# EAGLE board DINx4 (EAGLE 6.4)
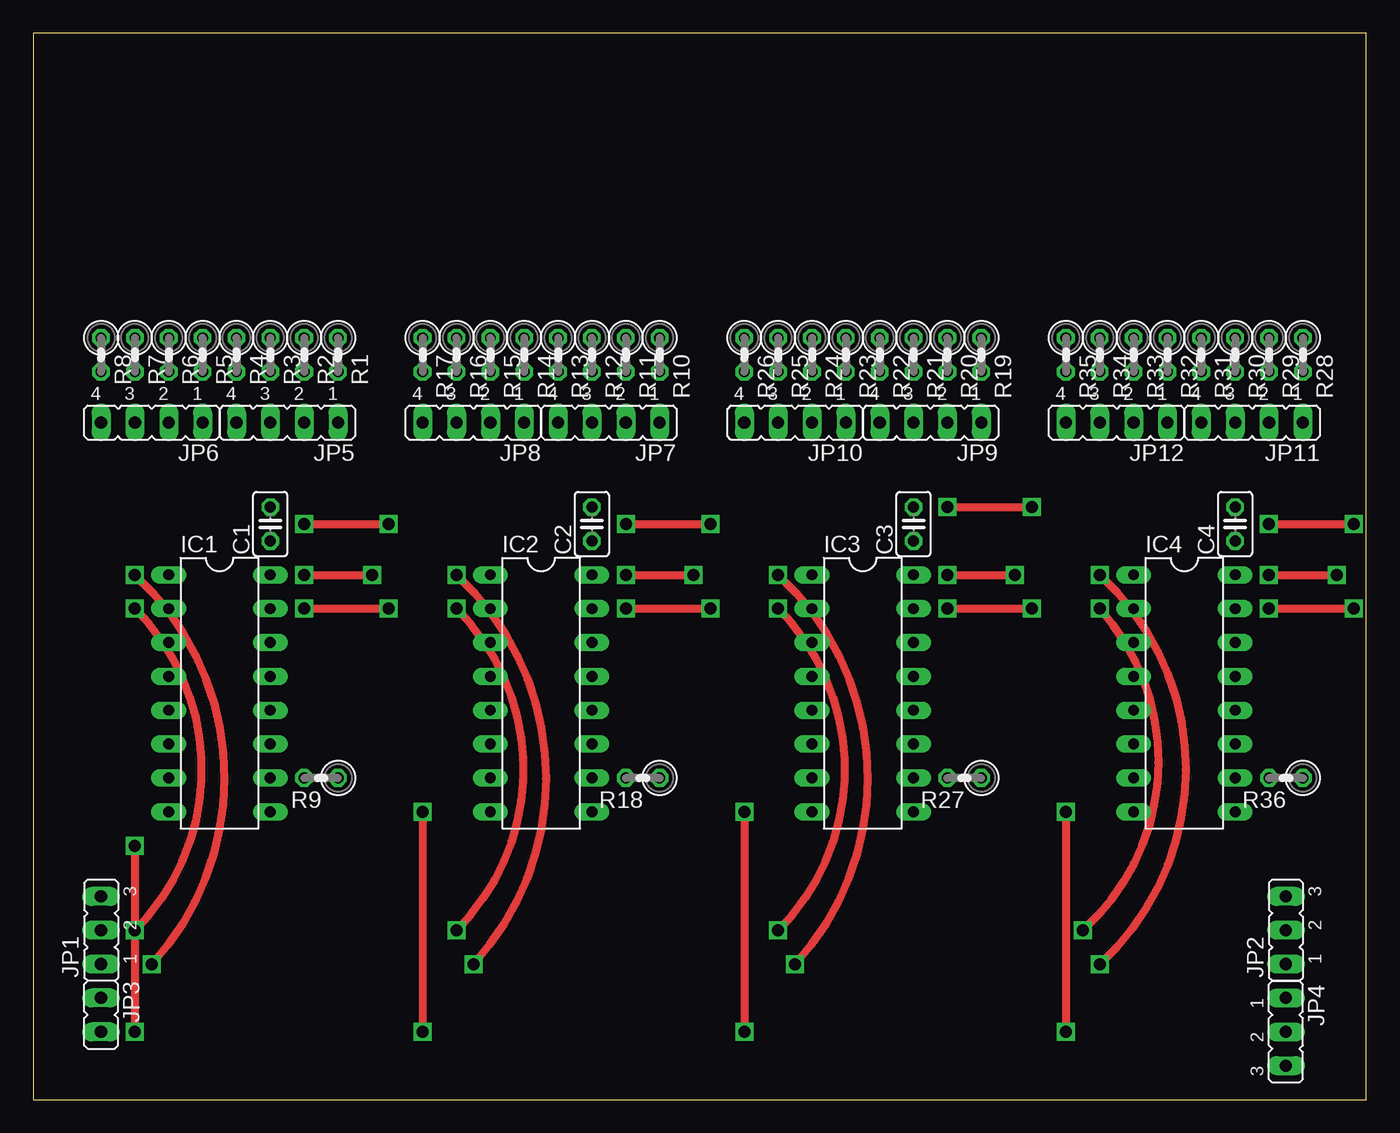
[diagram p0: board, top side]
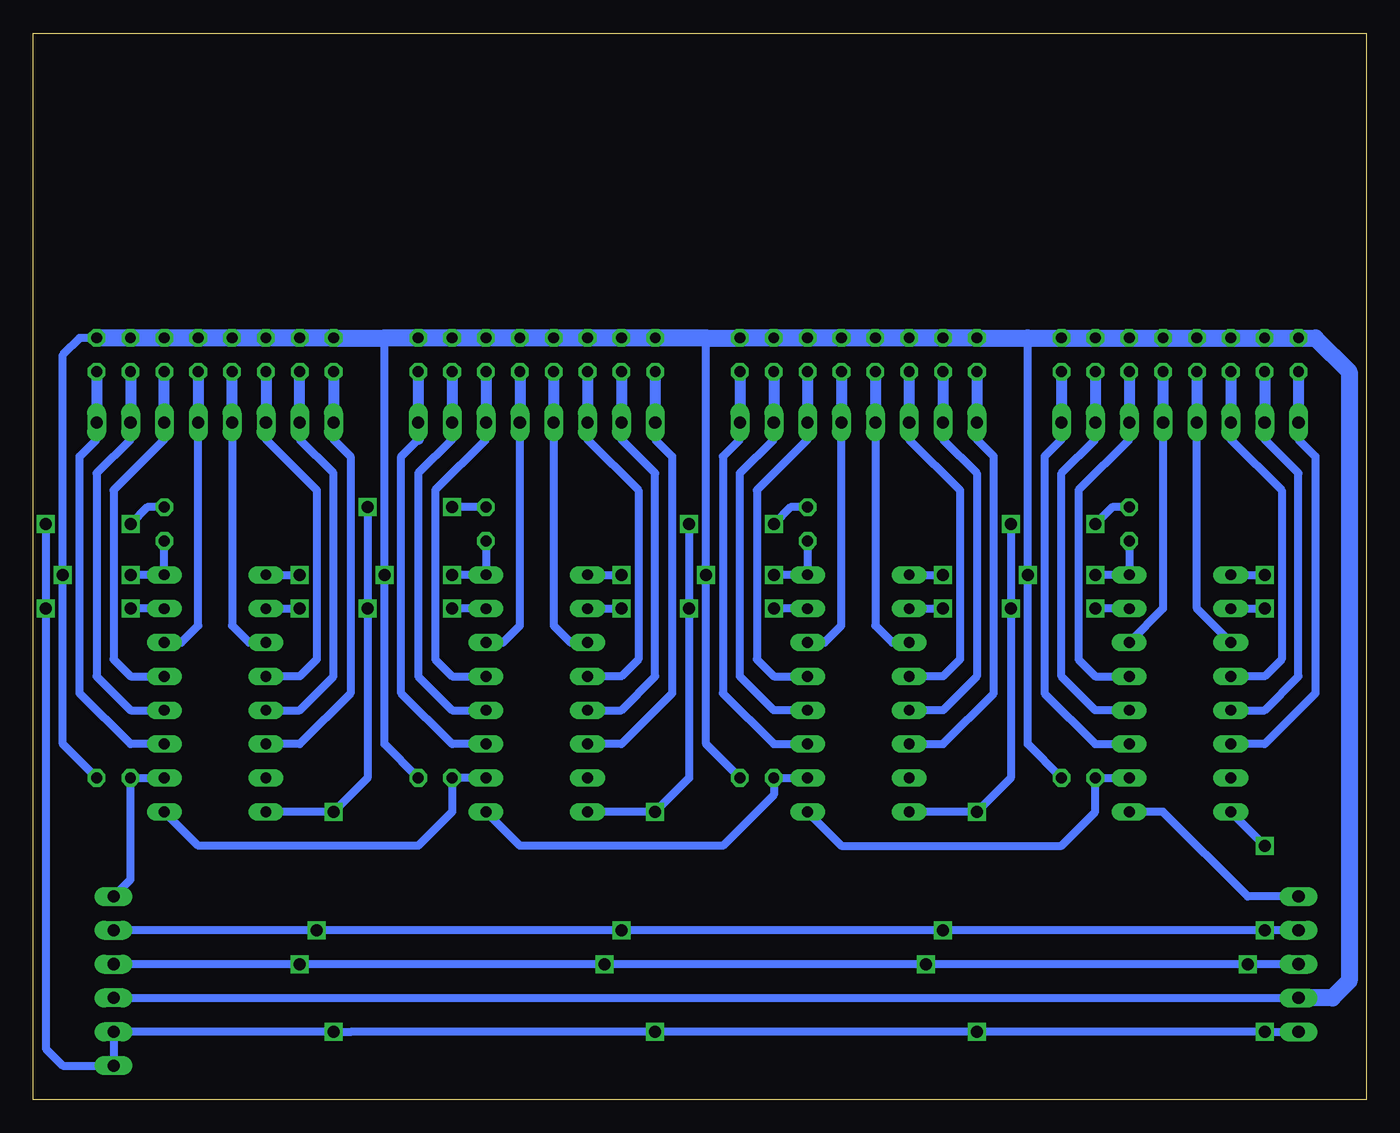
[diagram p1: board, bottom side, seen from below]

Size 100 x 80 mm. Coordinates in mm from the lower left corner, seen from the top.
Outline: 0,0 100,0 100,80 0,80 0,0
Copper layers (1*16): Top 0.035mm / dielectric 1.5mm / Bottom 0.035mm
Design rules "default": minimum track width 10mil, minimum drill 24mil, track to track 8mil, track to pad 8mil, pad to pad 8mil, via to via 8mil, smd to smd 8mil, copper to edge 40mil, drill to drill 8mil, minimum pad ring 10mil, minimum via ring 8mil, stop-mask expansion 4mil, vias tented up to drill 0mil, thermal gap 10mil

## Footprints (pad centres in the part's own frame; a part is rotated, then mirrored left to right if it is on the bottom)
C025-025X050 = drill 0.813 octagon: 1 -1.27,0; 2 1.27,0
DIL16 = drill 0.813 long: 1 -8.89,-3.81; 2 -6.35,-3.81; 3 -3.81,-3.81; 4 -1.27,-3.81; 5 1.27,-3.81; 6 3.81,-3.81; 7 6.35,-3.81; 8 8.89,-3.81; 9 8.89,3.81; 10 6.35,3.81; 11 3.81,3.81; 12 1.27,3.81; 13 -1.27,3.81; 14 -3.81,3.81; 15 -6.35,3.81; 16 -8.89,3.81
JP2 = drill 0.914 long: 1 -2.54,0; 2 0,0; 3 2.54,0
JP1 = drill 0.914 long: 1 0,-1.27; 2 0,1.27
JP4 = drill 0.914 long: 1 -3.81,0; 2 -1.27,0; 3 1.27,0; 4 3.81,0
0207/2V = drill 0.813 octagon: 1 -1.27,0; 2 1.27,0

## Placement (x,y rotation side)
C1  [C025-025X050]  17.78,43.18 90 top
C2  [C025-025X050]  41.91,43.18 90 top
C3  [C025-025X050]  66.04,43.18 90 top
C4  [C025-025X050]  90.17,43.18 90 top
IC1  74HC165N  [DIL16]  13.97,30.48 270 top
IC2  74HC165N  [DIL16]  38.1,30.48 270 top
IC3  74HC165N  [DIL16]  62.23,30.48 270 top
IC4  74HC165N  [DIL16]  86.36,30.48 270 top
JP1  [JP2]  5.08,12.7 90 top
JP2  [JP2]  93.98,12.7 90 top
JP3  [JP1]  5.08,6.35 180 top
JP4  [JP2]  93.98,5.08 270 top
JP5  [JP4]  19.05,50.8 180 top
JP6  [JP4]  8.89,50.8 180 top
JP7  [JP4]  43.18,50.8 180 top
JP8  [JP4]  33.02,50.8 180 top
JP9  [JP4]  67.31,50.8 180 top
JP10  [JP4]  57.15,50.8 180 top
JP11  [JP4]  91.44,50.8 180 top
JP12  [JP4]  81.28,50.8 180 top
R1  [0207/2V]  22.86,55.88 270 top
R2  [0207/2V]  20.32,55.88 270 top
R3  [0207/2V]  17.78,55.88 270 top
R4  [0207/2V]  15.24,55.88 270 top
R5  [0207/2V]  12.7,55.88 270 top
R6  [0207/2V]  10.16,55.88 270 top
R7  [0207/2V]  7.62,55.88 270 top
R8  [0207/2V]  5.08,55.88 270 top
R9  [0207/2V]  21.59,24.13 180 top
R10  [0207/2V]  46.99,55.88 270 top
R11  [0207/2V]  44.45,55.88 270 top
R12  [0207/2V]  41.91,55.88 270 top
R13  [0207/2V]  39.37,55.88 270 top
R14  [0207/2V]  36.83,55.88 270 top
R15  [0207/2V]  34.29,55.88 270 top
R16  [0207/2V]  31.75,55.88 270 top
R17  [0207/2V]  29.21,55.88 270 top
R18  [0207/2V]  45.72,24.13 180 top
R19  [0207/2V]  71.12,55.88 270 top
R20  [0207/2V]  68.58,55.88 270 top
R21  [0207/2V]  66.04,55.88 270 top
R22  [0207/2V]  63.5,55.88 270 top
R23  [0207/2V]  60.96,55.88 270 top
R24  [0207/2V]  58.42,55.88 270 top
R25  [0207/2V]  55.88,55.88 270 top
R26  [0207/2V]  53.34,55.88 270 top
R27  [0207/2V]  69.85,24.13 180 top
R28  [0207/2V]  95.25,55.88 270 top
R29  [0207/2V]  92.71,55.88 270 top
R30  [0207/2V]  90.17,55.88 270 top
R31  [0207/2V]  87.63,55.88 270 top
R32  [0207/2V]  85.09,55.88 270 top
R33  [0207/2V]  82.55,55.88 270 top
R34  [0207/2V]  80.01,55.88 270 top
R35  [0207/2V]  77.47,55.88 270 top
R36  [0207/2V]  93.98,24.13 180 top

## Library data of the parts
C1-C4 R1-R36 = rcl
IC1-IC4 = 74xx-eu
JP1-JP12 = jumper

## Nets
+5V: C1.1 C2.1 C3.1 C4.1 IC1.16 IC2.16 IC3.16 IC4.16 JP3.1 JP4.1 R1.1 R2.1 R3.1 R4.1 R5.1 R6.1 R7.1 R8.1 R9.1 R10.1 R11.1 R12.1 R13.1 R14.1 R15.1 R16.1 R17.1 R18.1 R19.1 R20.1 R21.1 R22.1 R23.1 R24.1 R25.1 R26.1 R27.1 R28.1 R29.1 R30.1 R31.1 R32.1 R33.1 R34.1 R35.1 R36.1
GND: C1.2 C2.2 C3.2 C4.2 IC1.8 IC1.15 IC2.8 IC2.15 IC3.8 IC3.15 IC4.8 IC4.15 JP3.2 JP4.2 JP4.3
N$1: IC1.11 JP5.1 R1.2
N$2: IC1.12 JP5.2 R2.2
N$3: IC1.3 JP6.1 R5.2
N$4: IC1.13 JP5.3 R3.2
N$5: IC1.14 JP5.4 R4.2
N$6: IC1.4 JP6.2 R6.2
N$7: IC1.5 JP6.3 R7.2
N$8: IC1.6 JP6.4 R8.2
N$9: IC1.9 JP1.3
N$10: IC1.2 IC2.2 IC3.2 IC4.2 JP1.2 JP2.2
N$11: IC1.1 IC2.1 IC3.1 IC4.1 JP1.1 JP2.1
N$12: IC2.11 JP7.1 R10.2
N$13: IC3.10 IC4.9 R27.2
N$14: IC2.13 JP7.3 R12.2
N$15: IC2.14 JP7.4 R13.2
N$16: IC2.12 JP7.2 R11.2
N$17: IC2.3 JP8.1 R14.2
N$18: IC2.5 JP8.3 R16.2
N$19: IC2.6 JP8.4 R17.2
N$20: IC2.4 JP8.2 R15.2
N$25: IC3.11 JP9.1 R19.2
N$26: IC3.13 JP9.3 R21.2
N$27: IC3.14 JP9.4 R22.2
N$28: IC3.12 JP9.2 R20.2
N$29: IC3.3 JP10.1 R23.2
N$30: IC3.5 JP10.3 R25.2
N$31: IC3.6 JP10.4 R26.2
N$32: IC3.4 JP10.2 R24.2
N$37: IC4.11 JP11.1 R28.2
N$38: IC4.13 JP11.3 R30.2
N$39: IC4.14 JP11.4 R31.2
N$40: IC4.12 JP11.2 R29.2
N$41: IC4.3 JP12.1 R32.2
N$42: IC4.5 JP12.3 R34.2
N$43: IC4.6 JP12.4 R35.2
N$44: IC4.4 JP12.2 R33.2
N$48: IC4.10 JP2.3 R36.2
N$49: IC1.10 IC2.9 R9.2
N$51: IC2.10 IC3.9 R18.2

## Tracks (layer width: path | path; a pad name or v marks a point on that pad's centre or on a via)
+5V  (via drill 0.9)
  Top 0.61: v20.32,39.37 v25.4,39.37 | v92.71,39.37 v97.79,39.37 | v44.45,39.37 v49.53,39.37 | v68.58,39.37 v73.66,39.37
  Bottom 0.61: R9.1 25.4,26.67 v25.4,39.37 25.4,57.15 | 49.53,57.15 v49.53,39.37 49.53,26.67 R18.1 | R27.1 73.66,26.67 v73.66,39.37 73.66,57.15 | R8.1 R7.1 R6.1 R5.1 R4.1 | R17.1 R16.1 R15.1 R14.1 R13.1 | R13.1 R12.1 R11.1 R10.1 R13.1 | R26.1 R25.1 R24.1 R23.1 R22.1 R21.1 R20.1 R19.1 | R35.1 R34.1 R33.1 R32.1 R31.1 R30.1 R29.1 R28.1 96.52,57.15 97.79,55.88 v97.79,39.37 97.79,26.67 R36.1 | C1.1 IC1.16 v20.32,39.37 | JP4.1 JP3.1 | C2.1 IC2.16 v44.45,39.37 | C4.1 IC4.16 v92.71,39.37 | v68.58,39.37 IC3.16 C3.1
  Bottom 1.27: R3.1 R8.1 | R3.1 3.81,57.15 1.27,54.61 1.27,8.89 2.54,7.62 JP3.1 | R28.1 R35.1 73.66,57.15 R19.1 49.53,57.15 R10.1 R17.1 25.4,57.15 R1.1 R2.1 R3.1
GND  (via drill 0.9)
  Top 0.61: v20.32,43.18 v26.67,43.18 | v92.71,43.18 v99.06,43.18 | v44.45,43.18 v50.8,43.18 | v68.58,44.45 v74.93,44.45 | v92.71,36.83 v99.06,36.83 | v68.58,36.83 v74.93,36.83 | v44.45,36.83 v50.8,36.83 | v20.32,36.83 v26.67,36.83 | v7.62,19.05 v7.62,5.08 | v29.21,21.59 v29.21,5.08 | v53.34,21.59 v53.34,5.08 | v77.47,21.59 v77.47,5.08
  Bottom 0.61: C1.2 19.05,44.45 v20.32,43.18 | C4.2 91.44,44.45 v92.71,43.18 | v99.06,43.18 v99.06,36.83 99.06,3.81 97.79,2.54 JP4.3 JP4.2 v77.47,5.08 76.2,5.08 v53.34,5.08 v29.21,5.08 v7.62,5.08 JP3.2 | C2.2 43.18,44.45 v44.45,43.18 | v50.8,43.18 v50.8,36.83 50.8,24.13 v53.34,21.59 IC3.8 | v26.67,43.18 v26.67,36.83 26.67,24.13 v29.21,21.59 IC2.8 | C3.2 v68.58,44.45 | IC4.8 v77.47,21.59 74.93,24.13 v74.93,36.83 v74.93,44.45 | IC4.15 v92.71,36.83 | IC3.15 v68.58,36.83 | IC2.15 v44.45,36.83 | IC1.15 v20.32,36.83 | IC1.8 v7.62,19.05
N$1
  Bottom 0.61: JP5.1 22.86,49.53 24.13,48.26 24.13,30.48 20.32,26.67 IC1.11
  Bottom 0.813: R1.2 JP5.1
N$2
  Bottom 0.61: IC1.12 20.32,29.21 22.86,31.75 22.86,46.99 20.32,49.53 JP5.2
  Bottom 0.813: R2.2 JP5.2
N$3
  Bottom 0.61: IC1.3 12.7,36.83 JP6.1
  Bottom 0.813: R5.2 JP6.1
N$4
  Bottom 0.61: JP5.3 17.78,49.53 21.59,45.72 21.59,33.02 20.32,31.75 IC1.13
  Bottom 0.813: R3.2 JP5.3
N$5
  Bottom 0.61: JP5.4 15.24,36.83 IC1.14
  Bottom 0.813: R4.2 JP5.4
N$6
  Bottom 0.61: JP6.2 10.16,49.53 6.35,45.72 6.35,33.02 7.62,31.75 IC1.4
  Bottom 0.813: R6.2 JP6.2
N$7
  Bottom 0.61: IC1.5 7.62,29.21 5.08,31.75 5.08,46.99 7.62,49.53 JP6.3
  Bottom 0.813: R7.2 JP6.3
N$8
  Bottom 0.61: JP6.4 5.08,49.53 3.81,48.26 3.81,30.48 7.62,26.67 IC1.6
  Bottom 0.813: R8.2 JP6.4
N$9
  Bottom 0.61: JP1.3 8.89,15.24 15.24,21.59 IC1.9
N$10  (via drill 0.9)
  Top 0.61: v7.62,36.83 arc-90 v7.62,12.7 | v31.75,36.83 arc-90 v31.75,12.7 | v55.88,36.83 arc-90 v55.88,12.7 | v80.01,36.83 arc-90 v78.74,12.7
  Bottom 0.61: JP1.2 v7.62,12.7 v31.75,12.7 v55.88,12.7 v78.74,12.7 JP2.2 | IC1.2 v7.62,36.83 | IC2.2 v31.75,36.83 | IC3.2 v55.88,36.83 | IC4.2 v80.01,36.83
N$11  (via drill 0.9)
  Top 0.61: v7.62,39.37 arc-90 v8.89,10.16 | v31.75,39.37 arc-90 v33.02,10.16 | v55.88,39.37 arc-90 v57.15,10.16 | v80.01,39.37 arc-90 81.28,11.43 v80.01,10.16
  Bottom 0.61: JP1.1 v8.89,10.16 v33.02,10.16 v57.15,10.16 v80.01,10.16 JP2.1 | IC1.1 v7.62,39.37 | IC2.1 v31.75,39.37 | IC3.1 v55.88,39.37 | IC4.1 v80.01,39.37
N$12
  Bottom 0.61: JP7.1 46.99,49.53 48.26,48.26 48.26,30.48 44.45,26.67 IC2.11
  Bottom 0.813: R10.2 JP7.1
N$13
  Bottom 0.61: IC3.10 R27.2 68.58,21.59 71.12,19.05 87.63,19.05 IC4.9
N$14
  Bottom 0.61: JP7.3 41.91,49.53 45.72,45.72 45.72,33.02 44.45,31.75 IC2.13
  Bottom 0.813: R12.2 JP7.3
N$15
  Bottom 0.61: IC2.14 40.64,34.29 39.37,35.56 JP7.4
  Bottom 0.813: R13.2 JP7.4
N$16
  Bottom 0.61: IC2.12 44.45,29.21 46.99,31.75 46.99,46.99 44.45,49.53 JP7.2
  Bottom 0.813: R11.2 JP7.2
N$17
  Bottom 0.61: JP8.1 36.83,35.56 35.56,34.29 IC2.3
  Bottom 0.813: R14.2 JP8.1
N$18
  Bottom 0.61: JP8.3 31.75,49.53 29.21,46.99 29.21,31.75 31.75,29.21 IC2.5
  Bottom 0.813: R16.2 JP8.3
N$19
  Bottom 0.61: IC2.6 31.75,26.67 27.94,30.48 27.94,48.26 29.21,49.53 JP8.4
  Bottom 0.813: R17.2 JP8.4
N$20
  Bottom 0.61: JP8.2 34.29,49.53 30.48,45.72 30.48,33.02 31.75,31.75 IC2.4
  Bottom 0.813: R15.2 JP8.2
N$25
  Bottom 0.61: IC3.11 68.58,26.67 72.39,30.48 72.39,48.26 71.12,49.53 JP9.1
  Bottom 0.813: R19.2 71.12,49.53
N$26
  Bottom 0.61: JP9.3 66.04,49.53 69.85,45.72 69.85,33.02 68.58,31.75 IC3.13
  Bottom 0.813: R21.2 JP9.3
N$27
  Bottom 0.61: IC3.14 64.77,34.29 63.5,35.56 JP9.4
  Bottom 0.813: R22.2 JP9.4
N$28
  Bottom 0.61: JP9.2 68.58,49.53 71.12,46.99 71.12,31.75 68.58,29.21 IC3.12
  Bottom 0.813: R20.2 JP9.2
N$29
  Bottom 0.61: JP10.1 60.96,35.56 59.69,34.29 IC3.3
  Bottom 0.813: R23.2 JP10.1
N$30
  Bottom 0.61: IC3.5 55.88,29.21 53.34,31.75 53.34,46.99 55.88,49.53 JP10.3
  Bottom 0.813: R25.2 JP10.3
N$31
  Bottom 0.61: JP10.4 53.34,49.53 52.07,48.26 52.07,30.48 55.88,26.67 IC3.6
  Bottom 0.813: R26.2 JP10.4
N$32
  Bottom 0.61: JP10.2 58.42,49.53 54.61,45.72 54.61,33.02 55.88,31.75 IC3.4
  Bottom 0.813: R24.2 JP10.2
N$37
  Bottom 0.61: IC4.11 92.71,26.67 96.52,30.48 96.52,48.26 95.25,49.53 JP11.1
  Bottom 0.813: R28.2 JP11.1
N$38
  Bottom 0.61: JP11.3 90.17,49.53 93.98,45.72 93.98,33.02 92.71,31.75 IC4.13
  Bottom 0.813: JP11.3 R30.2
N$39
  Bottom 0.61: IC4.14 88.9,34.29 87.63,35.56 JP11.4
  Bottom 0.813: R31.2 JP11.4
N$40
  Bottom 0.61: JP11.2 92.71,49.53 95.25,46.99 95.25,31.75 92.71,29.21 IC4.12
  Bottom 0.813: R29.2 JP11.2
N$41
  Bottom 0.61: JP12.1 85.09,35.56 83.82,34.29 IC4.3
  Bottom 0.813: JP12.1 R32.2
N$42
  Bottom 0.61: IC4.5 80.01,29.21 77.47,31.75 77.47,46.99 80.01,49.53 JP12.3
  Bottom 0.813: JP12.3 R34.2
N$43
  Bottom 0.61: JP12.4 77.47,49.53 76.2,48.26 76.2,30.48 80.01,26.67 IC4.6
  Bottom 0.813: R35.2 JP12.4
N$44
  Bottom 0.61: JP12.2 82.55,49.53 78.74,45.72 78.74,33.02 80.01,31.75 IC4.4
  Bottom 0.813: R33.2 JP12.2
N$48
  Bottom 0.61: JP2.3 92.71,16.51 R36.2 IC4.10
N$49
  Bottom 0.61: IC1.10 R9.2 20.32,21.59 22.86,19.05 39.37,19.05 IC2.9
N$51
  Bottom 0.61: IC2.10 R18.2 44.45,22.86 48.26,19.05 63.5,19.05 IC3.9